# Altium PCB 智能家居.PcbDoc
Units mm, origin at the board's own origin, x right, y up, seen from the top; angles counter-clockwise.
Board outline 145 x 95 mm, 2 copper layers (Top Layer 1, Bottom Layer 1), stack 0.48 mm thick; 55 components, 61 nets, 223 pads, 10 vias.
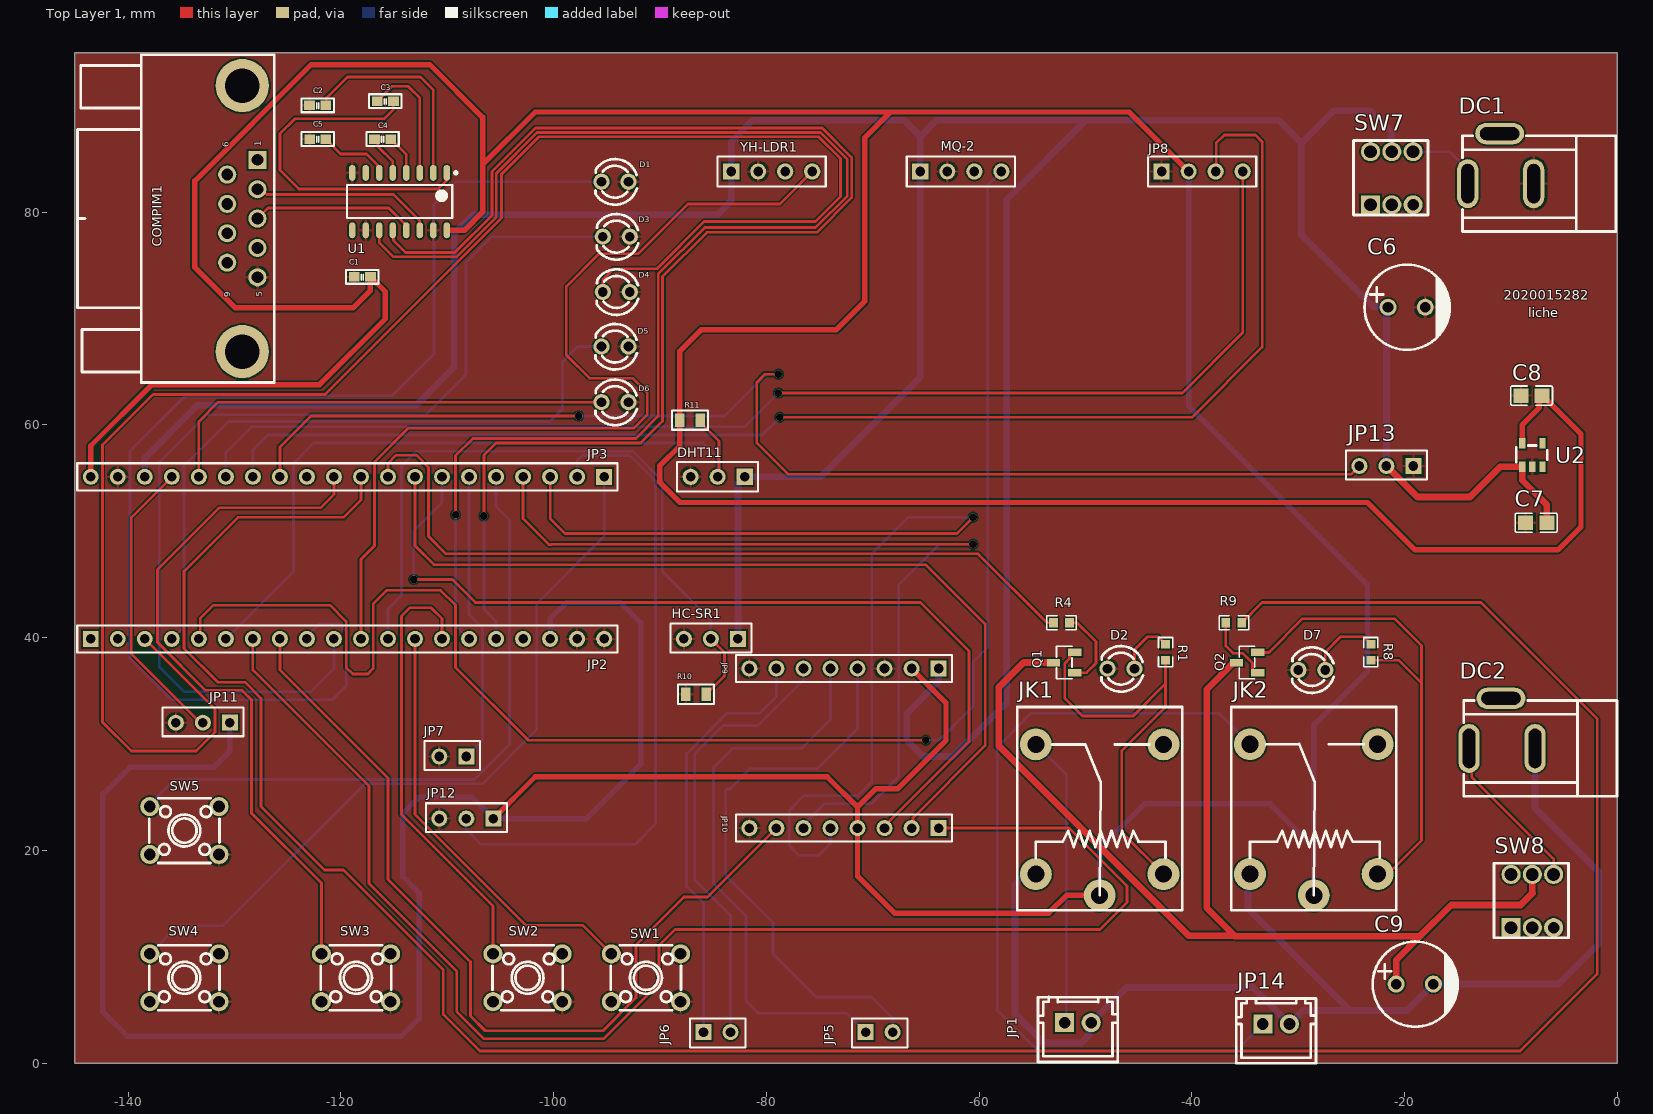
[diagram p0: Top Layer 1 view]
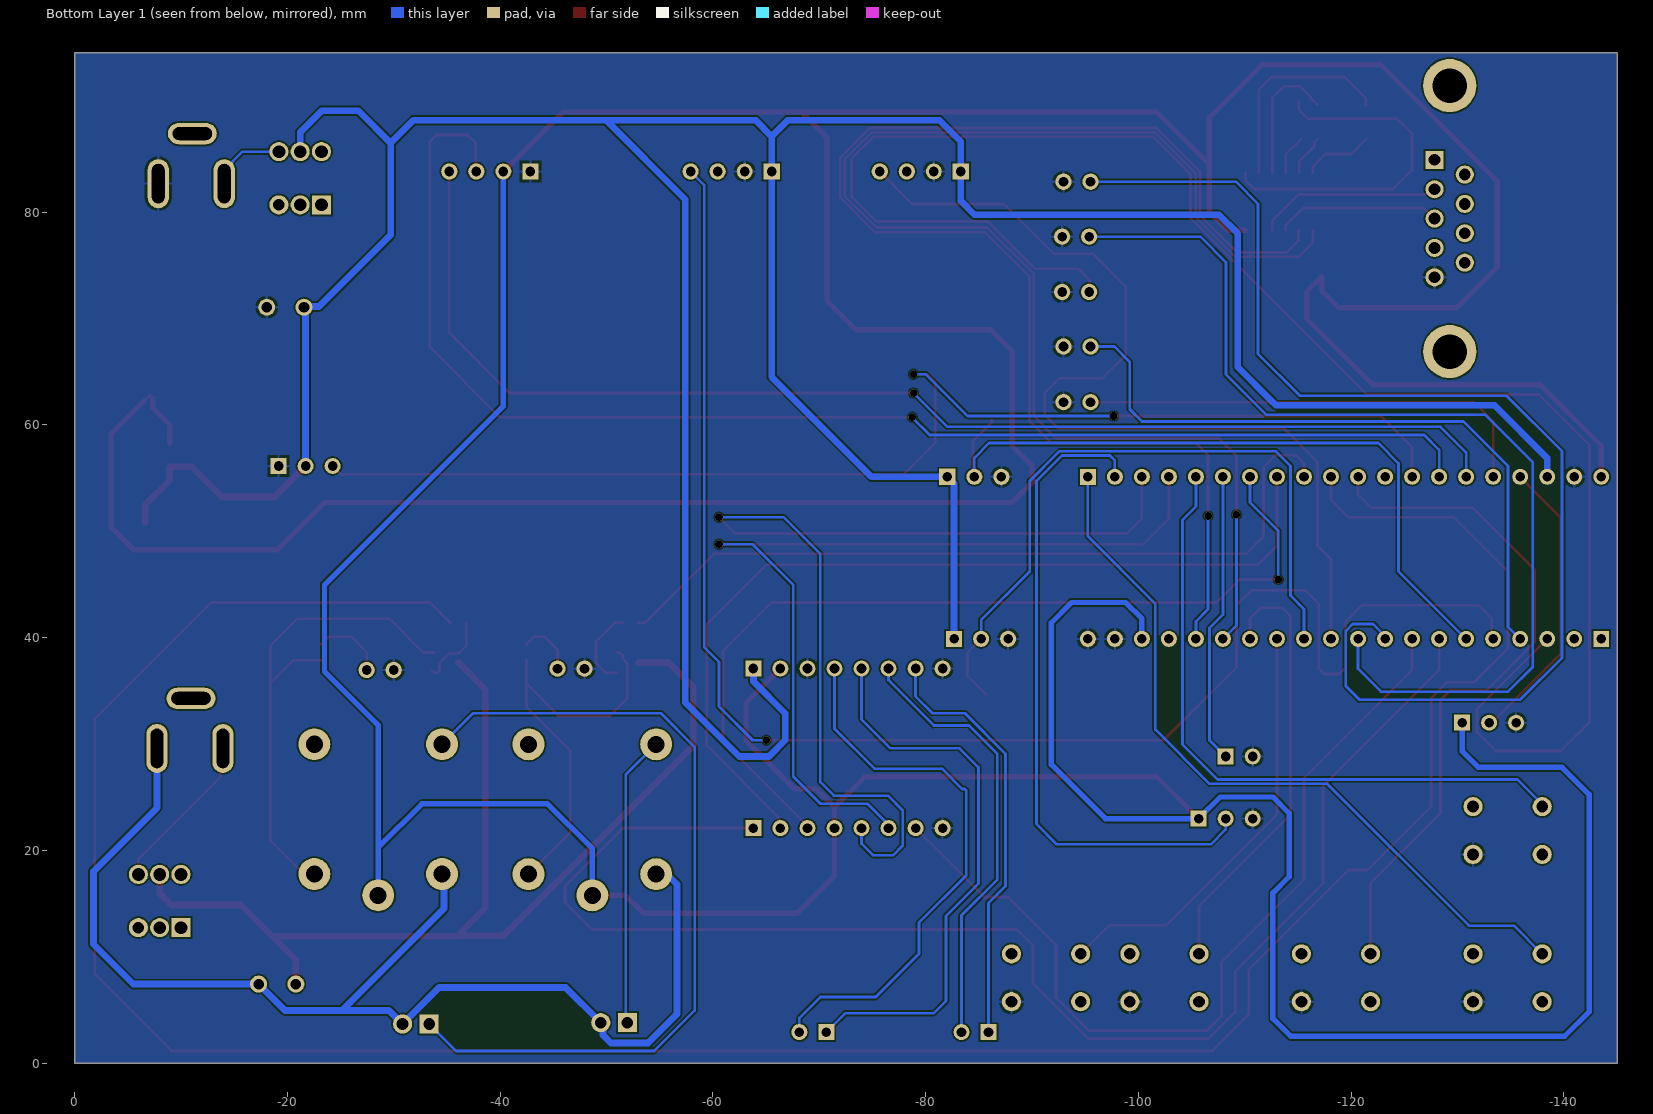
[diagram p1: Bottom Layer 1 view, seen from below]

## Layer stack, top to bottom
Top Solder: solder mask 0.0102, Solder Resist, Dk 3.5
Top Layer 1: signal copper 0.009
Dielectric 2: prepreg 0.0711, PP-006, Dk 4.1
Dielectric 1: dielectric 0.32, FR-4, Dk 4.8
Dielectric 3: prepreg 0.0711, PP-006, Dk 4.1
Bottom Layer 1: signal copper 0.009
Bottom Solder: solder mask 0.0102, Solder Resist, Dk 3.5

## Board outline
-145,0 -145,95 0,95 0,0

## Design rules (kind name [scope] priority, off if disabled: settings)
Clearance [All] p1: gap=0.152 ignorepadtopadclearanceinfootprint=FALSE
PlaneClearance [All] p1: clearance=0.203
PolygonConnect [All] p1: connectstyle=Relief reliefconductorwidth=0.254 reliefentries=4 polygonreliefangle="90 Angle" airgapwidth=0.254
RoutingVias [All] p1: holewidth=0.305 width=0.559 viastyle="Through Hole" minholewidth=0.305 minwidth=0.559 maxholewidth=0.305 maxwidth=0.559
SolderMaskExpansion [All] p1: expansion=0.102 istentingtop=FALSE
Width POWER [InNetClass('POWER')] p1: maxlimit=1.524 minlimit=0.381 preferedwidth=0.381
Width [All] p2: maxlimit=0.254 minlimit=0.254 preferedwidth=0.254
29 further rules are at their usual default settings.

## Classes and differential pairs
component class 智能家居图纸2: C1 C2 C3 C4 C5 COMPIM1 D1 D2 D3 D4 D5 D6 D7 JK1 JK2 JP1 JP2 JP3 JP13 JP14 m Q1 Q2 R1 R4 R8 R9 U1
component class 智能家居: *1 BOOT C6 C7 C8 C9 DC1 DC2 DHT11 HC-SR1 IC1 JP5 JP6 JP7 JP8 JP9 JP10 JP11 JP12 MQ-2 R10 R11 RST1 SW1 SW2 SW3 SW4 SW5 SW7 SW8 U2 U3 U4 YH-LDR1

## Components (designator, comment, footprint, x,y, rotation, side; value= is the part's Value field where it differs from the comment)
C1 "Cap" C0603 -117.983,73.914 r0 top value=0.1uF/50V
C2 "Cap" C0603 -122.174,90.043 r0 top value=0.1uF
C3 "Cap" C0603 -115.824,90.424 r0 top value=0.1uF/50V
C4 "Cap" C0603 -116.078,86.868 r0 top value=0.1uF/50V
C5 "Cap" C0603 -122.172,86.868 r0 top value=0.1uF
C6 "CAP2" CAP -19.685,71.12 r0 top
C7 "47uF" 47uF -7.822,50.785 r0 top
C8 "47uF" 47uF -8.255,62.738 r0 top
C9 "220uF/35V" CAP -18.923,7.493 r0 top
COMPIM1 "DB9_Male" DB9Male -129.263,79.392 r180 top
D1 "LED0" LED-Green -94.234,82.858 r180 top
D2 "LED" LED-Green -46.67,37.084 r180 top
D3 "LED1" LED-Red -94.107,77.693 r180 top
D4 "LED2" LED-White -94.107,72.494 r180 top
D5 "LED3" LED-yellow -94.234,67.361 r180 top
D6 "LED4" LED-yellow -94.234,62.135 r180 top
D7 "LED" LED-Red -28.731,36.957 r180 top
DC1 "DC005" DC005 -10.974,85.027 r180 top
DC2 "DC005" DC005 -10.847,31.941 r180 top
DHT11 "DHT11" HAR1X3-3 -85.852,55.118 r180 top
HC-SR1 "HC-SR501" HDR1X3-2 -85.217,39.878 r180 top
JK1 "SRD-05VDC-SL-C" SRD-C_B -54.672,17.772 r90 top
JK2 "SRD-05VDC-SL-C" SRD-C_B -34.544,17.78 r90 top
JP1 "2PIN" 2PIN -50.714,3.81 r0 top
JP2 "JP3" HDR1X20 -143.51,39.878 r0 top
JP3 "JP4" HDR1X20-2 -119.38,55.118 r180 top
JP5 "JP1" HDR1X2 -68.133,2.921 r0 top
JP6 "JP1" HDR1X2 -83.373,2.921 r0 top
JP7 "JP2" HDR1X2 -110.744,28.829 r180 top
JP8 "JP7" HAR1X4-2 -39.037,83.82 r0 top
JP9 "JP5" HDR1X8 -72.705,37.098 r180 top
JP10 "JP6" HDR1X8-2 -72.705,22.098 r180 top
JP11 "JP11" HDR1X3-3 -132.969,32.004 r180 top
JP12 "JP12" HDR1X3-3 -108.204,22.987 r180 top
JP13 "Servo" HDR1X3-5 -450.215,183.642 r180 top
JP14 "2PIN" 2PIN -32.085,3.683 r0 top
MQ-2 "MQ-2" HAR1X4-4 -61.722,83.82 r0 top
Q1 "PNP" PNP -52.004,37.657 r0 top
Q2 "PNP" PNP -34.817,37.657 r0 top
R1 "Res1" R200 -42.479,38.634 r90 top value=1.5k
R4 "Res1" R200 -52.258,41.402 r180 top value=1.5k
R8 "Res1" R200 -23.175,38.634 r90 top value=1.5k
R9 "Res1" R200 -36.054,41.402 r0 top value=1.5k
R10 "4.7K" "R 0805_L" -86.614,34.671 r180 top
R11 "4.7K" "R 0805_L" -87.188,60.452 r180 top
SW1 "KEY" KEY -91.233,8.001 r180 top
SW2 "KEY" KEY -102.362,8.001 r180 top
SW3 "KEY" KEY -118.491,8.001 r180 top
SW4 "KEY" KEY -134.62,8.001 r180 top
SW5 "KEY" KEY -134.62,21.844 r180 top
SW7 "K8-7071D-L1" K8 -21.209,83.185 r0 top
SW8 "K8-7071D-L1" K8 -8.001,15.24 r0 top
U1 "SP3232EEN-L/TR" SOP127P600X175-16N -114.485,80.992 r270 top
U2 "HT7833" HT7833 -8.128,57.15 r0 top
YH-LDR1 "YH-LDR" HAR1X4-4 -79.502,83.82 r0 top

## Footprints (in the part's own frame and the unit in brackets; to place one, negate y for a bottom-side part, rotate by r counter-clockwise, add the part's x,y. Pads: shape width x height; smd on the part's side, far side on the other; paste and mask are expansions set on the pad)
2PIN [mm]
  rect 1.8x1.8 hole 1.1 paste+0 mask+0.05: 1(-1.25,0)
  round 1.8 hole 1.1 paste+0 mask+0.05: 2(1.25,0)
  silkscreen extent -3.75,-3.7 3.75,2.41
47uF [mm]
  rect 1.41x1.35 smd paste-100 mask+0.051: 1(-0.814,0.015) 2(1.186,0.015)
  silkscreen extent -1.78,-0.89 2.15,0.92
C0603 [mil]
  rect 40x35 smd: 1(-29.92,0) 2(29.92,0)
  silkscreen extent -60,-26 60,26
CAP [mm]
  round 1.6 hole 1: 1(-1.88,-0.059) 2(1.62,-0.059)
  silkscreen extent -4.09,-4.06 3.91,3.94
DB9Male [mm]
  rect 1.7x1.7 hole 1.1: 1(-1.42,-5.52)
  round 1.7 hole 1.1: 2(-1.42,-2.76) 3(-1.42,0) 4(-1.42,2.76) 5(-1.42,5.52) 6(1.42,-4.14) 7(1.42,-1.38) 8(1.42,1.38) 9(1.42,4.14)
  round 5 hole 3.25: 10(0,12.5) 11(0,-12.5)
  silkscreen extent -3,-15.4 15.5,15.4
DC005 [mm]
  oval 2x4.6 hole 1.2 slot 3.7 at 90 deg: 1(3.1,2.35) 2(-3.1,2.35)
  oval 4.6x2 hole 1.2 slot 3.7 at 0 deg: 3(0.1,-2.35)
  silkscreen extent -10.8,-2.15 3.6,6.85
HAR1X3-3 [mm]
  round 1.5 hole 0.9: DATA(-1.27,0)
  round 1.524 hole 0.9: GND(1.27,0)
  rect 1.524x1.524 hole 0.9: VDD(-3.81,0)
  silkscreen extent -5.08,-1.4 2.54,1.4
HAR1X4-2 [mm]
  rect 1.524x1.524 hole 0.9: GND(-3.81,0)
  round 1.524 hole 0.9: SCK(1.27,0) SDA(3.81,0)
  round 1.5 hole 0.9: VCC(-1.27,0)
  silkscreen extent -5.08,-1.4 5.08,1.4
HAR1X4-4 [mm]
  round 1.524 hole 0.9: AO(3.81,0) DO(1.27,0)
  round 1.5 hole 0.9: GND(-1.27,0)
  rect 1.524x1.524 hole 0.9: VCC(-3.81,0)
  silkscreen extent -5.08,-1.4 5.08,1.4
HDR1X2 [mm]
  rect 1.5x1.5 hole 0.9: 1(-2.54,0)
  round 1.5 hole 0.9: 2(0,0)
  silkscreen extent -3.81,-1.44 1.4,1.27
HDR1X3-2 [mm]
  round 1.5 hole 0.9: GND(2.54,0) OUT(0,0)
  rect 1.5x1.5 hole 0.9: VCC(-2.54,0)
  silkscreen extent -3.81,-1.44 3.81,1.27
HDR1X3-3 [mm]
  round 1.5 hole 0.9: GND(2.54,0) I/O(0,0)
  rect 1.5x1.5 hole 0.9: VCC(-2.54,0)
  silkscreen extent -3.81,-1.44 3.81,1.27
HDR1X3-5 [mm]
  rect 1.5x1.5 hole 0.9: GND(-431.038,127.508)
  round 1.5 hole 0.9: PWM(-425.958,127.508) VCC(-428.498,127.508)
  silkscreen extent -432.31,126.07 -424.69,128.78
HDR1X8 [mm]
  rect 1.5x1.5 hole 0.9: 1(-8.89,0)
  round 1.5 hole 0.9: 2(-6.35,0) 3(-3.81,0) 4(-1.27,0) 5(1.27,0) 6(3.81,0) 7(6.35,0) 8(8.89,0)
  silkscreen extent -10.16,-1.27 10.16,1.27
HDR1X8-2 [mm]
  round 1.5 hole 0.9: 9(8.89,0) 10(6.35,0) 11(3.81,0) 12(1.27,0) 13(-1.27,0) 14(-3.81,0) 15(-6.35,0)
  rect 1.5x1.5 hole 0.9: 16(-8.89,0)
  silkscreen extent -10.16,-1.27 10.16,1.27
HDR1X20 [mm] "Connector; Header; 20 Position"
  rect 1.5x1.5 hole 0.9: 1(0,0)
  round 1.5 hole 0.9: 2(2.54,0) 3(5.08,0) 4(7.62,0) 5(10.16,0) 6(12.7,0) 7(15.24,0) 8(17.78,0) 9(20.32,0) 10(22.86,0) 11(25.4,0) 12(27.94,0) 13(30.48,0) 14(33.02,0) 15(35.56,0) 16(38.1,0) 17(40.64,0) 18(43.18,0) 19(45.72,0) 20(48.26,0)
  silkscreen extent -1.27,-1.27 49.53,1.27
HDR1X20-2 [mm]
  rect 1.5x1.5 hole 0.9: 21(-24.13,0)
  round 1.5 hole 0.9: 22(-21.59,0) 23(-19.05,0) 24(-16.51,0) 25(-13.97,0) 26(-11.43,0) 27(-8.89,0) 28(-6.35,0) 29(-3.81,0) 30(-1.27,0) 31(1.27,0) 32(3.81,0) 33(6.35,0) 34(8.89,0) 35(11.43,0) 36(13.97,0) 37(16.51,0) 38(19.05,0) 39(21.59,0) 40(24.13,0)
  silkscreen extent -25.4,-1.27 25.4,1.27
HT7833 [mm]
  rect 0.6x1 smd paste+0 mask+0.05: 1(-0.823,-1.077) 2(0.127,-1.077) 3(1.077,-1.077) 4(1.077,1.123) 5(-0.823,1.123)
  silkscreen extent -1.4,-0.68 1.52,0.91
K8 [mm]
  rect 1.8x1.8 hole 1.2 paste+0 mask+0.05: 1(-2,-2.5)
  round 1.8 hole 1.2 paste+0 mask+0.05: 2(0,-2.5) 4(-2,2.5) 5(0,2.5) 6(2,2.5)
  round 1.8 hole 1.1 paste+0 mask+0.05: 3(2,-2.5)
  silkscreen extent -3.6,-3.45 3.4,3.55
KEY [mm]
  round 1.8 hole 1.1: 1(-3.164,-2.275) 2(3.338,-2.275) 3(3.338,2.226) 4(-3.164,2.226)
  silkscreen extent -3.21,-3.07 3.39,3.02
LED-Green [mil]
  round 60 hole 36: 1(-50,0) 2(50,0)
  silkscreen extent -81,-84 72,85
LED-Red [mil]
  round 60 hole 36: 1(-50,0) 2(50,0)
  silkscreen extent -81,-84 72,85
LED-White [mil]
  round 60 hole 36: 1(-50,0) 2(50,0)
  silkscreen extent -81,-84 72,85
LED-yellow [mil]
  round 60 hole 36: 1(-50,0) 2(50,0)
  silkscreen extent -81,-84 72,85
PNP [mm]
  rect 1.25x0.7 smd: 1(1,-0.95) 2(1,0.95) 3(-1,0)
  silkscreen extent -0.73,-1.53 0.73,1.53
R200 [mm]
  rect 0.806x0.864 smd paste-100 mask+0.051: 1(-0.753,0) 2(0.753,0)
  silkscreen extent -1.39,-0.66 1.39,0.66
"R 0805_L" [mil] "1/8W贴片电阻"
  rect 35x50 smd: 1(-37.4,0) 2(37.4,0)
  silkscreen extent -67,-36 67,36, body extent -39,-25 39,25, height 20
SOP127P600X175-16N [mm] "SOP, 16-Leads, Body 9.90x3.90mm, Pitch 1.27mm, IPC Medium Density"
  oval 1.5x0.6 smd: 1(-2.7,4.445) 2(-2.7,3.175) 3(-2.7,1.905) 4(-2.7,0.635) 5(-2.7,-0.635) 6(-2.7,-1.905) 7(-2.7,-3.175) 8(-2.7,-4.445) 9(2.7,-4.445) 10(2.7,-3.175) 11(2.7,-1.905) 12(2.7,-0.635) 13(2.7,0.635) 14(2.7,1.905) 15(2.7,3.175) 16(2.7,4.445)
  silkscreen extent -2.82,-4.95 1.55,5.42, body extent -3,-4.95 3,4.95, height 1.75
SRD-C_B [mm] "单刀双投                  淘宝ID:黄晶宝石"
  round 3 hole 1.6: 1(0,0) 2(0,-12) 3(-2,-6) 4(12.2,0) 5(12.2,-12)
  silkscreen extent -3.4,-13.75 15.7,1.75, body extent -3.4,-13.75 15.7,1.75, height 15.6

## Part data
C1 C2 C3 C4 C5: "Capacitor", LatestRevisionDate=17-Jul-2002, LatestRevisionNote="Re-released for DXP Platform.", PackageDescription="Radial Cap, Thru-Hole; 2 Leads; 0.3 in Pin Spacing", PackageReference=RAD-0.3, Published=8-Jun-2000, Publisher="Altium Limited"
C7 C8: library part C, "贴片电容", BOM名称=无极性贴片电容, 唯一出售店铺网址=https://shop463601444.taobao.com, 淘宝ID="封装库来自淘宝 ID：黄晶宝石", 联系售后，技术支持=https://shop463601444.taobao.com
C9: library part CAP2
COMPIM1: "9针串口线  RS232"
D1: "Typical INFRARED GaAs LED", LatestRevisionDate=08-Jul-2005, LatestRevisionNote="Mech Layer 1 removed.", PackageDescription="LED; 2 Leads", PackageReference=LED-0, Published=8-Jun-2000, Publisher="Altium Limited"
D2 D7: "发光二极管"
D3: "Typical RED GaAs LED", LatestRevisionDate=08-Jul-2005, LatestRevisionNote="Mech Layer 1 removed.", PackageDescription="LED; 2 Leads", PackageReference=LED-1, Published=8-Jun-2000, Publisher="Altium Limited"
D4: "Typical RED, GREEN, YELLOW, AMBER GaAs LED", LatestRevisionDate=17-Jul-2002, LatestRevisionNote="Re-released for DXP Platform.", PackageDescription="SM LED; 2 Flat Leads", PackageReference=3.2X1.6X1.1, PackageVersion=Feb-2002, Published=8-Jun-2000, Publisher="Altium Limited"
D5: "Typical BLUE SiC LED", DatasheetVersion=16-Apr-2002, LatestRevisionDate=17-Dec-2003, LatestRevisionNote="PCB Footprint replaced.", PackageDescription="SM LED; 2 C-Bend Leads; Body 3.5 x 2.8 x 1.9 mm, inc leads (LxWxH typ)", PackageReference=3.5X2.8X1.9, PackageVersion=16-Apr-2002, Published=8-Jun-2000, Publisher="Altium Limited"
D6: library part LED, "发光二极管", 技术支持，联系售后=https://shop463601444.taobao.com
DC1 DC2: Current Rating (Max)=500mA, JLCPCB Part Class="Extended Part", LCSC Part Name="DC电源插座 内径:2mm 外径:6.3mm", Manufacturer="SHOU HAN(首韩)", Operating Temperature Range=-40℃~+55℃, Voltage Rating (Max)=30V, Add into BOM=yes, Connector Type=DC电源插座, Convert to PCB=yes, Datasheet=https://atta.szlcsc.com/upload/public/pdf/source/20190925/C431533_4751811035784AC1D38EBC85F7905E99.pdf, Device=DC005, Inside Contact Diameter=2mm, Manufacturer Part=DC005, Mounting Style=弯插, Outside Contact Diameter=6.3mm, Supplier=LCSC, Supplier Footprint=插件, Supplier Part=C431533, Symbol=DC005_C431533
DHT11: "温湿度传感器"
HC-SR1: "人体红外热释电传感器"
JK1 JK2: "5V一组转换", BOM名称=5V继电器, 学习资源=https://shop463601444.taobao.com, 版权归属="封装库来自淘宝卖家 ID：黄晶宝石"
JP1 JP14: library part JP, "插针"
JP2: "STM32插针第一列"
JP3: "STM32插针第二列"
JP5 JP6: "插针"
JP7: "USB转串口"
JP8: "OLED引脚插针"
JP9: "直流电机驱动模块插针第一列"
JP10: "直流电机驱动模块第二列"
JP11: "蜂鸣器插针"
JP13: "舵机"
MQ-2: "烟雾传感器"
Q1 Q2: library part 45H11, "互补功率-PNP型", BOM名称=互补功率-PNP型, 属性="80V 8A 50W", 技术支持，联系售后=https://shop463601444.taobao.com, 版权归属="封装库来自淘宝 ID：黄晶宝石"
R1 R4 R8 R9: "Resistor", LatestRevisionDate=17-Jul-2002, LatestRevisionNote="Re-released for DXP Platform.", PackageDescription="Axial Device, Thru-Hole; 2 Leads; 0.3 in Pin Spacing", PackageReference=AXIAL-0.3, Published=8-Jun-2000, Publisher="Altium Limited"
R10 R11: library part R, "贴片电阻", BOM名称=贴片电阻, 封装库来自淘宝卖家 ID：黄晶宝石=其他店铺购入均为盗版，不享受售后技术支持服务，请立即申请退款, 版权归属="来自淘宝 ID：黄晶宝石", 联系售后=https://shop463601444.taobao.com
SW1 SW2 SW3 SW4 SW5: "普通按键"
SW7 SW8: Actuator/Cap Color=蓝色, Contact Current=100mA, Insulation Resistance=100mΩ, IP Rating=-, JLCPCB Part Class="Extended Part", Manufacturer=韩国韩荣, Operating Force=230gf@±50gf, Operating Temperature=-25℃~+80℃, Voltage Rating (DC)=30V, Actuator Style=矩形柱塞, Add into BOM=yes, Convert to PCB=yes, Datasheet=https://atta.szlcsc.com/upload/public/pdf/source/20210810/1E23F383FB1C24682B487C492BB0592B.pdf, Device=K8-7071D-L1, LCSC Part Name=K8-7071D-L1, Manufacturer Part=K8-7071D-L1, Mechanical Life=100000, Mounting Style=直插, Pin Style=PC引脚, Self Lock / No Lock=自锁, Supplier=LCSC, Supplier Footprint=插件, Supplier Part=C111759, Symbol=K8-7071D-L1, Voltage Rating (AC)=-, With Lamp=无
U1: "RS-232接口集成电路"
U2: "5V转3.3V电路"
YH-LDR1: "光敏传感器"

## Via types
v1: diameter 0.711, hole 0.711, Top Layer 1 to Bottom Layer 1, 10 vias

## Nets (pads, with @x,y where several pads share a name; then routed paths per layer and width w, separated by ;. In a path a pad name is that pad's centre, name@x,y a point inside that pad or via, vN(x,y) a via of type N, cw(c..) or ccw(c..) an arc to the next point about the centre after c; other vN are vias at no path point)
5V_IN: C9.1 Q1.3 Q2.3 SW8.5 | length 106.2
  Top Layer 1 w0.254: Q2.3@-36.092,37.657 Q2.3 ; -8.001,16.002 -7.979,15.98
  Top Layer 1 w0.635: Q1.3 -55.815,37.657 -58.166,35.306 -58.166,29.845 -40.292,11.971 -35.974,11.971 ; Q2.3@-36.092,37.657 -38.608,35.141 -38.608,14.605 -35.974,11.971 ; -35.941,11.938 -18.542,11.938 ; -35.941,11.971 -35.974,11.971 ; C9.1 -20.803,9.677 -18.542,11.938 ; -8.001,16.002 SW8.5 ; -7.979,15.98 -9.1,14.859 -15.621,14.859 -18.542,11.938
+5V: C6.1 C7.2 DHT11.VDD HC-SR1.VCC JP3.38 JP9.1 JP13.VCC MQ-2.VCC SW7.5 U2.1 YH-LDR1.VCC | length 341.4
  Top Layer 1 w0.635: JP13.VCC -18.796,53.213 -13.843,53.213 -10.983,56.073 U2.1 -8.951,54.798 -6.636,52.483 C7.2
  Bottom Layer 1 w0.254: -112.53,62.238 -112.26,62.238
  Bottom Layer 1 w0.635: JP3.38 -138.43,56.896 -133.477,61.849 -112.918,61.849 -112.53,62.238 -109.347,65.42 -109.347,77.978 -107.569,79.756 -84.582,79.756 -83.312,81.026 YH-LDR1.VCC -83.312,86.614 -81.28,88.646 -67.056,88.646 -65.532,87.122 ; HC-SR1.VCC -82.677,54.483 DHT11.VDD -74.93,55.118 -65.532,64.516 MQ-2.VCC -65.532,87.122 ; JP9.1 -63.815,35.88 -66.802,32.893 -66.802,30.353 -65.278,28.829 -62.484,28.829 -57.404,33.909 -57.404,81.188 -49.946,88.646 ; JP13.VCC -21.717,70.908 C6.1 ; C6.1@-21.717,71.12 -22.987,71.12 -29.718,77.851 -29.718,86.487 ; SW7.5 -21.209,87.503 -23.241,89.535 -26.67,89.535 -29.718,86.487 ; -65.532,87.122 -64.008,88.646 -49.946,88.646 ; -49.946,88.646 -31.877,88.646 -29.718,86.487
AO1: JP5.2 JP9.4 | length 52.7
  Bottom Layer 1 w0.254: JP9.4 -71.435,31.435 -75.184,27.686 -81.534,27.686 -83.439,25.781 -83.671,25.781 -83.82,25.632 -83.82,17.653 -79.375,13.208 -79.375,10.287 -75.311,6.223 -70.104,6.223 -68.133,4.252 JP5.2
AO2: JP5.1 JP9.5 | length 53.3
  Bottom Layer 1 w0.254: JP9.5 -73.975,32.324 -76.708,29.591 -83.185,29.591 -84.963,27.813 -84.963,16.891 -81.915,13.843 -81.915,5.842 -80.772,4.699 -72.451,4.699 JP5.1
BO1: JP6.1 JP9.7 | length 40.1
  Bottom Layer 1 w0.254: JP6.1 -85.913,15.047 -87.503,16.637 -87.503,29.083 -83.693,32.893 -80.645,32.893 -79.055,34.483 JP9.7
BO2: JP6.2 JP9.6 | length 41.9
  Top Layer 1 w0.254: JP6.2 JP6.2@-83.246,3.048
  Bottom Layer 1 w0.254: JP6.2 -83.373,13.904 -86.741,17.272 -86.741,29.083 -84.074,31.75 -80.772,31.75 -76.515,36.007 JP9.6
GND: C1.1 C2.1 C5.1 C6.2 C7.1 C8.1 COMPIM1.5 D1.1 D2.2 D3.1 D4.1 D5.1 D6.1 D7.2 DC1.2 DHT11.GND HC-SR1.GND JP2.19 JP2.20 JP3.39 JP7.2 JP8.GND JP9.3 JP9.8 JP10.9 JP11.GND JP12.GND JP13.GND MQ-2.GND R10.2 SW1.4 SW2.4 SW3.4 SW4.4 SW5.4 U1.8 U1.10 U1.15 U2.2 YH-LDR1.GND
GND_OUT: C9.2 DC2.2 JK1.1 JK2.1 JP1.2 JP14.2 | length 116.3
  Bottom Layer 1 w0.635: JK1.1@-54.925,18.534 -56.642,16.817 -56.642,4.629 -53.918,1.905 -50.406,1.905 -50.034,2.277 -50.034,2.29 -49.664,2.66 -49.664,3.61 JP1.2 -46.162,7.112 -34.264,7.112 JP14.2 -29.565,4.953 -25.146,4.953 ; JK2.1@-34.733,18.534 -34.733,14.54 -25.146,4.953 ; DC2.2 -7.747,24.003 -1.778,18.034 -1.778,11.176 -5.52,7.434 C9.2 -19.783,4.953 -25.146,4.953
NetC2_2: C2.2 U1.2 | length 19.9
  Top Layer 1 w0.254: C2.2 -121.37,90.087 -121.37,90.72 -119.38,92.71 -112.522,92.71 -111.31,91.498 U1.2
NetC3_1: C3.1 U1.3 | length 12.5
  Top Layer 1 w0.254: C3.1@-116.862,90.146 -116.798,90.146 -116.203,90.742 -116.203,90.805 -115.187,91.821 -113.665,91.821 -112.58,90.736 U1.3
NetC3_2: C3.2 U1.1 | length 33.3
  Top Layer 1 w0.254: C3.2 -115.064,89.66 -115.951,88.773 -124.333,88.773 -125.73,87.376 -125.73,83.947 -123.952,82.169 -110.871,82.169 -110.106,82.934 -110.106,83.626 U1.1
NetC4_1: C4.1 U1.5 | length 3.9
  Top Layer 1 w0.254: C4.1 -116.544,86.574 -116.544,86.191 -115.12,84.767 U1.5
NetC4_2: C4.2 U1.4 | length 3.8
  Top Layer 1 w0.254: C4.2 -113.85,85.4 U1.4
NetC5_2: C5.2 U1.6 | length 6.7
  Top Layer 1 w0.254: C5.2 -120.015,85.471 -117.602,85.471 -116.559,84.428 -116.559,84.405 -116.39,84.236 U1.6
NetD2_1: D2.1 R1.2 | length 5.5
  Top Layer 1 w0.254: D2.1 -45.4,38.862 -44.178,40.084 -43.176,40.084 R1.2
NetD7_1: D7.1 R8.2 | length 6.9
  Top Layer 1 w0.254: D7.1 -27.461,38.64 -26.017,40.084 -23.872,40.084 R8.2
NetDC1_1: DC1.1 SW7.6 | length 7.1
  Bottom Layer 1 w0.254: SW7.6 -15.781,85.685 -14.074,83.977 DC1.1
NetDC2_1: DC2.1 SW8.6 | length 15.1
  Top Layer 1 w0.254: DC2.1 -13.702,29.347 -13.702,26.91 -6.001,19.209 SW8.6
NetJK1_2: JK1.2 Q1.2 R1.1 | length 39.7
  Top Layer 1 w0.254: Q1.2 -51.279,38.607 -51.502,38.384 -51.502,38.033 -51.943,37.592 -51.943,34.29 -50.292,32.639 -45.514,32.639 -42.479,35.674 ; JK1.2 -46.609,21.709 -46.609,29.337 -42.479,33.467 -42.479,35.674 ; R1.1 -42.479,35.674
NetJK1_4: JK1.4 JP1.1 | length 27.4
  Bottom Layer 1 w0.254: JK1.4 -51.816,27.116 -51.816,3.958 JP1.1
NetJK2_2: JK2.2 Q2.2 R8.1 | length 47.2
  Top Layer 1 w0.254: Q2.2 -32.767,38.607 -29.591,41.783 -20.955,41.783 -18.415,39.243 -18.415,35.722 ; R8.1 -20.574,37.881 -18.415,35.722 ; JK2.2 -22.019,18.305 -21.059,18.305 -18.415,20.95 -18.415,35.722
NetJK2_4: JK2.4 JP14.1 | length 79.7
  Bottom Layer 1 w0.254: JK2.4 -37.457,32.893 -55.118,32.893 -58.293,29.718 -58.293,4.953 -54.483,1.143 -35.875,1.143 JP14.1 JP14.1@-34.108,4.456
NetQ1_1: Q1.1 R4.1 | length 7.6
  Top Layer 1 w0.254: R4.1 -50.8,41.402 -49.022,39.624 -49.022,37.592 -49.907,36.707 Q1.1
NetQ2_1: Q2.1 R9.1 | length 6.9
  Top Layer 1 w0.254: R9.1 -36.807,39.22 -36.131,38.544 -35.242,38.544 -34.315,37.617 -34.315,36.93 -34.092,36.707 Q2.1 Q2.1@-33.594,36.93
PA0: JP2.5 MQ-2.AO | length 149.4
  Top Layer 1 w0.254: JP2.5 -133.223,39.751 -133.223,39.878 -133.223,41.783 -131.953,43.053 -121.031,43.053 -119.507,41.529 -119.507,37.211 -118.872,36.576 -117.475,36.576 -116.967,37.084 -116.967,38.862 -116.967,43.18 -115.697,44.45 -110.617,44.45 -109.22,43.053 -109.22,37.211 -102.362,30.353 v1(-65.024,30.353)
  Bottom Layer 1 w0.254: v1(-65.024,30.353) -63.754,30.353 -60.579,33.528 -60.579,37.719 -59.182,39.116 -59.182,82.55 MQ-2.AO
PA1: DHT11.DATA JP2.6 R11.1 | length 68.6
  Top Layer 1 w0.254: R11.1 -86.238,60.261 -84.455,58.479 -84.455,55.245 DHT11.DATA
  Bottom Layer 1 w0.254: JP2.6@-131.063,39.625 JP2.6 -124.46,46.228 -124.46,56.388 -122.555,58.293 -85.979,58.293 -84.582,56.896 DHT11.DATA
PA2: JP2.7 JP10.16 | length 135.9
  Top Layer 1 w0.254: JP2.7 -128.27,36.957 -117.348,26.035 -117.348,16.891 -109.093,8.636 -109.093,4.826 -106.553,2.286 -95.311,2.286 -90.104,7.493 -90.104,11.049 -88.58,12.573 -48.641,12.573 -46.101,15.113 -46.101,16.637 -51.562,22.098 JP10.16
PA3: JP2.8 JP10.10 | length 83
  Top Layer 1 w0.254: JP2.8 -125.73,36.957 -115.57,26.797 -115.57,17.272 -107.823,9.525 -107.823,4.445 -106.426,3.048 -95.377,3.048 -92.263,6.162 -92.263,11.115 -87.757,15.621 -85.532,15.621 JP10.10
PA4: D1.2 JP2.9 | length 114.6
  Top Layer 1 w0.254: D1.2@-95.834,82.858 D1.2
  Bottom Layer 1 w0.254: JP2.9@-122.936,40.386 -122.047,41.275 -120.142,41.275 -119.507,40.64 -119.507,35.433 -120.777,34.163 -135.89,34.163 -139.827,38.1 -139.827,57.531 -134.62,62.738 -115.189,62.738 -111.252,66.675 -111.252,80.772 -109.166,82.858 D1.2
PA5: D3.2 JP2.10 | length 97.8
  Top Layer 1 w0.254: D3.2@-96.052,77.724 -95.721,77.392 D3.2@-95.377,77.392
  Bottom Layer 1 w0.254: JP2.10 -120.65,37.084 -122.809,34.925 -134.747,34.925 -137.085,37.263 -137.085,56.463 -132.588,60.96 -112.014,60.96 -108.236,64.738 -108.236,75.279 -105.823,77.692 D3.2
PA6: JP2.11 YH-LDR1.AO | length 89.8
  Top Layer 1 w0.254: JP2.11 -118.11,47.371 -116.84,48.641 -116.84,56.515 -113.665,59.69 -92.456,59.69 -91.186,60.96 -91.186,62.992 -92.583,64.389 -96.647,64.389 -98.806,66.548 -98.806,73.025 -95.758,76.073 -92.075,76.073 -87.376,80.772 -78.74,80.772 YH-LDR1.AO
PA7: HC-SR1.OUT JP2.12 R10.1 | length 66.2
  Top Layer 1 w0.254: R10.1 -83.947,36.388 -83.947,38.608 HC-SR1.OUT
  Bottom Layer 1 w0.254: JP2.12 -115.57,42.672 -114.3,43.942 -114.3,56.134 -112.903,57.531 -92.605,57.531 -89.789,54.715 -89.789,46.228 -85.217,41.656 HC-SR1.OUT
PA8: JP3.25 SW5.2 | length 62.3
  Top Layer 1 w0.254: SW5.2@-137.958,23.912 SW5.2
  Bottom Layer 1 w0.254: SW5.2 -137.958,24.348 -135.636,26.67 -107.442,26.67 -104.14,29.972 -104.14,51.054 -105.41,52.324 JP3.25
PA9: JP3.26 JP7.1 | length 27.8
  Top Layer 1 w0.254: JP7.1 JP7.1@-107.95,29.083
  Bottom Layer 1 w0.254: JP7.1 -106.68,30.353 -106.68,40.894 -107.95,42.164 JP3.26
PA10: JP3.27 JP10.14 | length 85.7
  Top Layer 1 w0.254: v1(-113.157,45.466) -109.519,45.466 -107.36,43.307 -65.532,43.307 -60.96,38.735 -60.96,30.226 -68.895,22.291 JP10.14
  Bottom Layer 1 w0.254: v1(-113.157,45.466) -113.157,50.038 -110.49,52.705 JP3.27
PA11: JP3.28 JP10.15 | length 85.2
  Top Layer 1 w0.254: JP3.28 -113.03,48.641 -111.252,46.863 -65.024,46.863 -59.436,41.275 -59.436,29.845 -66.223,23.058 -66.223,22.23 JP10.15
PA12: JP3.29 R4.2 | length 74.5
  Top Layer 1 w0.254: JP3.29 -115.57,56.388 -114.808,57.15 -112.903,57.15 -111.76,56.007 -111.76,49.53 -110.109,47.879 -60.096,47.879 -53.619,41.402 R4.2
PA15: JP3.30 R9.2 | length 251.5
  Top Layer 1 w0.254: JP3.30 -118.11,52.959 -119.761,51.308 -129.667,51.308 -134.747,46.228 -134.747,38.989 -131.572,35.814 -129.032,35.814 -127.508,34.29 -127.508,24.13 -121.539,18.161 -119.761,18.161 -110.363,8.763 -110.363,4.572 -106.934,1.143 -45.019,1.143 -9.144,1.143 -1.905,8.382 -1.905,32.385 -12.827,43.307 -33.395,43.307 R9.2
PB0: JP2.13 SW1.2 | length 40.4
  Top Layer 1 w0.254: JP2.13 -113.03,23.368 -102.616,12.954 -97.249,12.954 SW1.2
PB1: JP2.14 SW2.2 | length 41.8
  Top Layer 1 w0.254: JP2.14 -110.49,41.783 -111.506,42.799 -113.538,42.799 -114.3,42.037 -114.3,23.368 -105.7,14.768 SW2.2
PB3: JP3.31 SW3.2 | length 65.7
  Top Layer 1 w0.254: SW3.2 -121.829,16.927 -128.397,23.495 -128.397,34.163 -129.286,35.052 -132.715,35.052 -137.228,39.565 -137.228,46.414 -131.445,52.197 -121.92,52.197 -120.65,53.467 JP3.31
PB4: JP3.32
PB5: JP3.33 JP13.PWM | length 118.7
  Top Layer 1 w0.254: JP3.33 -125.73,57.912 -122.809,60.833 v1(-97.663,60.833) ; v1(-78.867,64.77) -80.137,64.77 -80.899,64.008 -80.899,58.293 -77.978,55.372 -25.019,55.372 JP13.PWM
  Bottom Layer 1 w0.254: v1(-97.663,60.833) -83.947,60.833 -80.01,64.77 v1(-78.867,64.77)
PB6: JP3.34 JP8.SCK | length 128.2
  Top Layer 1 w0.254: v1(-78.74,60.706) -40.005,60.706 -33.401,67.31 -33.401,86.614 -34.036,87.249 -36.957,87.249 -37.719,86.487 JP8.SCK@-37.719,83.868
  Bottom Layer 1 w0.254: JP3.34 -128.27,57.658 -126.873,59.055 -80.391,59.055 v1(-78.74,60.706)
PB7: JP3.35 JP8.SDA | length 117.7
  Top Layer 1 w0.254: v1(-78.867,62.992) -40.894,62.992 -35.227,68.659 JP8.SDA
  Bottom Layer 1 w0.254: JP3.35 -130.81,57.404 -128.397,59.817 -82.042,59.817 v1(-78.867,62.992)
PB8: D6.2 JP3.36 | length 43.8
  Top Layer 1 w0.254: JP3.36 -133.35,60.325 -131.54,62.135 D6.2
PB9: JP3.37 JP11.I/O | length 27.6
  Top Layer 1 w0.254: JP3.37 -139.7,51.308 -139.7,38.481 -133.223,32.004 JP11.I/O
PB10: JP2.15 U1.11 | length 130
  Top Layer 1 w0.254: U1.11 -116.401,78.281 -116.401,77.161 -115.034,75.794 -109.125,75.794 -105.385,79.534 -105.385,83.652 -101.544,87.493 -74.92,87.493 -72.39,84.963 -72.39,81.534 -75.375,78.549 -85.789,78.549 -90.17,74.168 -90.17,60.833 -92.278,58.725 -107.6,58.725 -109.22,57.105 v1(-109.22,51.562)
  Bottom Layer 1 w0.254: v1(-109.22,51.562) -109.22,41.148 JP2.15
PB11: JP2.16 U1.12 | length 127
  Top Layer 1 w0.254: U1.12 -115.054,78.226 -115.054,77.339 -113.914,76.2 -109.293,76.2 -105.791,79.702 -105.791,83.82 -101.712,87.899 -74.751,87.899 -71.984,85.131 -71.984,81.366 -75.244,78.105 -85.598,78.105 -89.764,73.939 -89.764,60.35 -91.821,58.293 -105.41,58.293 -106.553,57.15 v1(-106.553,51.435)
  Bottom Layer 1 w0.254: v1(-106.553,51.435) -106.553,42.672 -105.41,41.529 JP2.16
PB12: JP3.21 SW4.2 | length 71.5
  Bottom Layer 1 w0.254: SW4.2 -135.302,12.932 -131.086,12.932 -117.754,26.264 -106.705,26.264 -101.6,31.369 -101.6,43.18 -95.25,49.53 JP3.21
PB13: JP3.22 JP12.I/O | length 62.5
  Bottom Layer 1 w0.254: JP12.I/O -108.204,21.971 -106.807,20.574 -92.329,20.574 -90.424,22.479 -90.424,54.737 -92.812,57.125 -97.307,57.125 -97.79,56.642 JP3.22
PB14: JP3.23 JP10.12 | length 95.6
  Top Layer 1 w0.254: JP3.23 -100.33,51.181 -98.933,49.784 -62.103,49.784 v1(-60.579,51.308)
  Bottom Layer 1 w0.254: JP10.12 -73.975,20.64 -75.057,19.558 -76.962,19.558 -77.851,20.447 -77.851,23.749 -76.454,25.146 -71.374,25.146 -70.104,26.416 -70.104,47.879 -66.675,51.308 v1(-60.579,51.308)
PB15: JP3.24 JP10.11 | length 84.8
  Top Layer 1 w0.254: JP3.24 -102.87,51.181 -100.435,48.746 -100.225,48.746 -100.203,48.768 v1(-60.579,48.768)
  Bottom Layer 1 w0.254: JP10.11@-76.581,22.352 -74.549,24.384 -70.104,24.384 -67.564,26.924 -67.564,44.958 -63.754,48.768 v1(-60.579,48.768)
PC13: JP2.2
PC14OSC32_IN: D4.2 JP2.3 | length 165
  Top Layer 1 w0.254: JP2.3 -131.826,33.274 -131.826,31.115 -133.604,29.337 -139.7,29.337 -142.412,32.049 -142.412,58.121 -137.668,62.865 -121.479,62.865 -104.902,79.442 -104.902,83.56 -101.375,87.086 -75.088,87.086 -73.025,85.023 -73.025,81.474 -75.378,79.121 -85.852,79.121 -90.297,74.676 -94.361,74.676 -95.377,73.66 D4.2
PC15OSC32_OUT: D5.2 JP2.4 | length 63.2
  Bottom Layer 1 w0.254: JP2.4 -134.747,41.021 -134.747,56.134 -130.556,60.325 -100.33,60.325 -99.187,61.468 -99.187,65.913 -97.739,67.361 D5.2
PC_RX: COMPIM1.2 U1.14 | length 17.4
  Top Layer 1 w0.254: COMPIM1.2 -127.462,82.152 -126.971,81.661 -115.062,81.661 -112.58,79.179 U1.14
PC_TX: COMPIM1.3 U1.13 | length 15.5
  Top Layer 1 w0.254: COMPIM1.3 -126.844,80.391 -115.499,80.391 -113.85,78.742 U1.13
RES: JP2.17
VB: JP2.1
VCC: C1.2 C8.2 JK1.3 JK2.3 JP2.18 JP3.40 JP8.VCC JP9.2 JP10.13 JP11.VCC JP12.VCC R11.2 U1.16 U2.5 | length 678.3
  Top Layer 1 w0.254: C8.2@-7.099,62.753 C8.2 -7.039,62.753 -6.491,62.205 C8.2@-6.491,62.145
  Top Layer 1 w0.381: C8.2@-7.359,62.493 C8.2@-7.099,62.753
  Top Layer 1 w0.508: JP3.40 -143.51,58.039 -137.795,63.754 -122.047,63.754 -115.824,69.977 -115.824,72.515 C1.2 -117.223,72.642 -118.872,70.993 -129.921,70.993 -133.731,74.803 -133.731,82.931 -122.809,93.853 -111.633,93.853 -106.68,88.9 -106.68,84.455 ; U1.16 -108.398,78.292 -106.68,80.01 -106.68,84.455 ; JP12.VCC -101.727,26.924 -74.29,26.924 -71.435,24.069 ; JP9.2 -63.119,33.862 -63.119,30.353 -67.691,25.781 -69.723,25.781 -71.435,24.069 ; JK1.3 -51.792,15.772 -53.467,14.097 -67.945,14.097 -71.435,17.587 JP10.13 -71.435,24.069 ; JP8.VCC -45.895,89.408 -68.326,89.408 ; U2.5 -8.951,60.005 -7.359,61.597 C8.2@-7.359,62.493 ; C8.2@-6.491,62.205 -3.429,59.142 -3.429,50.419 -5.588,48.26 -19.05,48.26 -23.495,52.705 -88.138,52.705 -90.043,54.61 -90.043,56.134 -88.138,58.039 R11.2 -88.138,66.929 -86.106,68.961 -73.406,68.961 -70.739,71.628 -70.739,86.995 -68.326,89.408 ; -106.68,84.455 -101.727,89.408 -68.326,89.408
  Bottom Layer 1 w0.508: JP11.VCC@-130.829,32.404 JP11.VCC -130.429,29.337 -131.953,27.813 -139.827,27.813 -142.367,25.273 -142.367,4.826 -140.081,2.54 -114.3,2.54 -112.649,4.191 -112.649,16.002 -114.173,17.526 -114.173,23.495 -112.649,25.019 -107.696,25.019 JP12.VCC -96.901,22.987 -91.821,28.067 -91.821,41.402 -93.726,43.307 -98.806,43.307 -100.33,41.783 JP2.18 ; JK1.3 -48.672,20.162 -44.45,24.384 -32.639,24.384 -28.544,20.289 ; JP8.VCC -40.307,61.77 -23.495,44.958 -23.495,36.83 -28.544,31.781 -28.544,20.289 ; JK2.3 -28.544,20.289
pads on no net: COMPIM1.1 COMPIM1.4 COMPIM1.6 COMPIM1.7 COMPIM1.8 COMPIM1.9 COMPIM1.10 COMPIM1.11 DC1.3 DC2.3 JK1.5 JK2.5 MQ-2.DO SW1.1 SW1.3 SW2.1 SW2.3 SW3.1 SW3.3 SW4.1 SW4.3 SW5.1 SW5.3 SW7.1 SW7.2 SW7.3 SW7.4 SW8.1 SW8.2 SW8.3 SW8.4 U1.7 U1.9 U2.3 U2.4 YH-LDR1.DO

## Polygon pours and split planes (outlines as drawn)
GND on Top Layer 1 "GND_L01_P000" (solid, remove dead copper, pour order 0): -144.907,94.996 0,94.996 0,0 -145.034,0
GND on Bottom Layer 1 "GND_L02_P001" (solid, remove dead copper, pour order 1): -144.907,94.996 0,94.996 0,0 -145.034,0

## Silkscreen, mask and mechanical layers (free items; w line width, h text height)
Top Overlay:
  text "2020015282" at -10.668,71.755 h0.9
  text "liche" at -8.382,70.104 h0.9
Mechanical 1:
  the board outline again, w0.254

## Text inside footprints (layer, text, board x,y; h text height)
COMPIM1: Top Overlay "5" at -127.409,72.043 h0.58 r90; Top Overlay "1" at -127.51,86.191 h0.58 r90; Top Overlay "6" at -130.558,86.089 h0.58 r90; Top Overlay "9" at -130.406,72.018 h0.58 r90